# EAGLE board 4draft_onBoard (EAGLE 8.1.0)
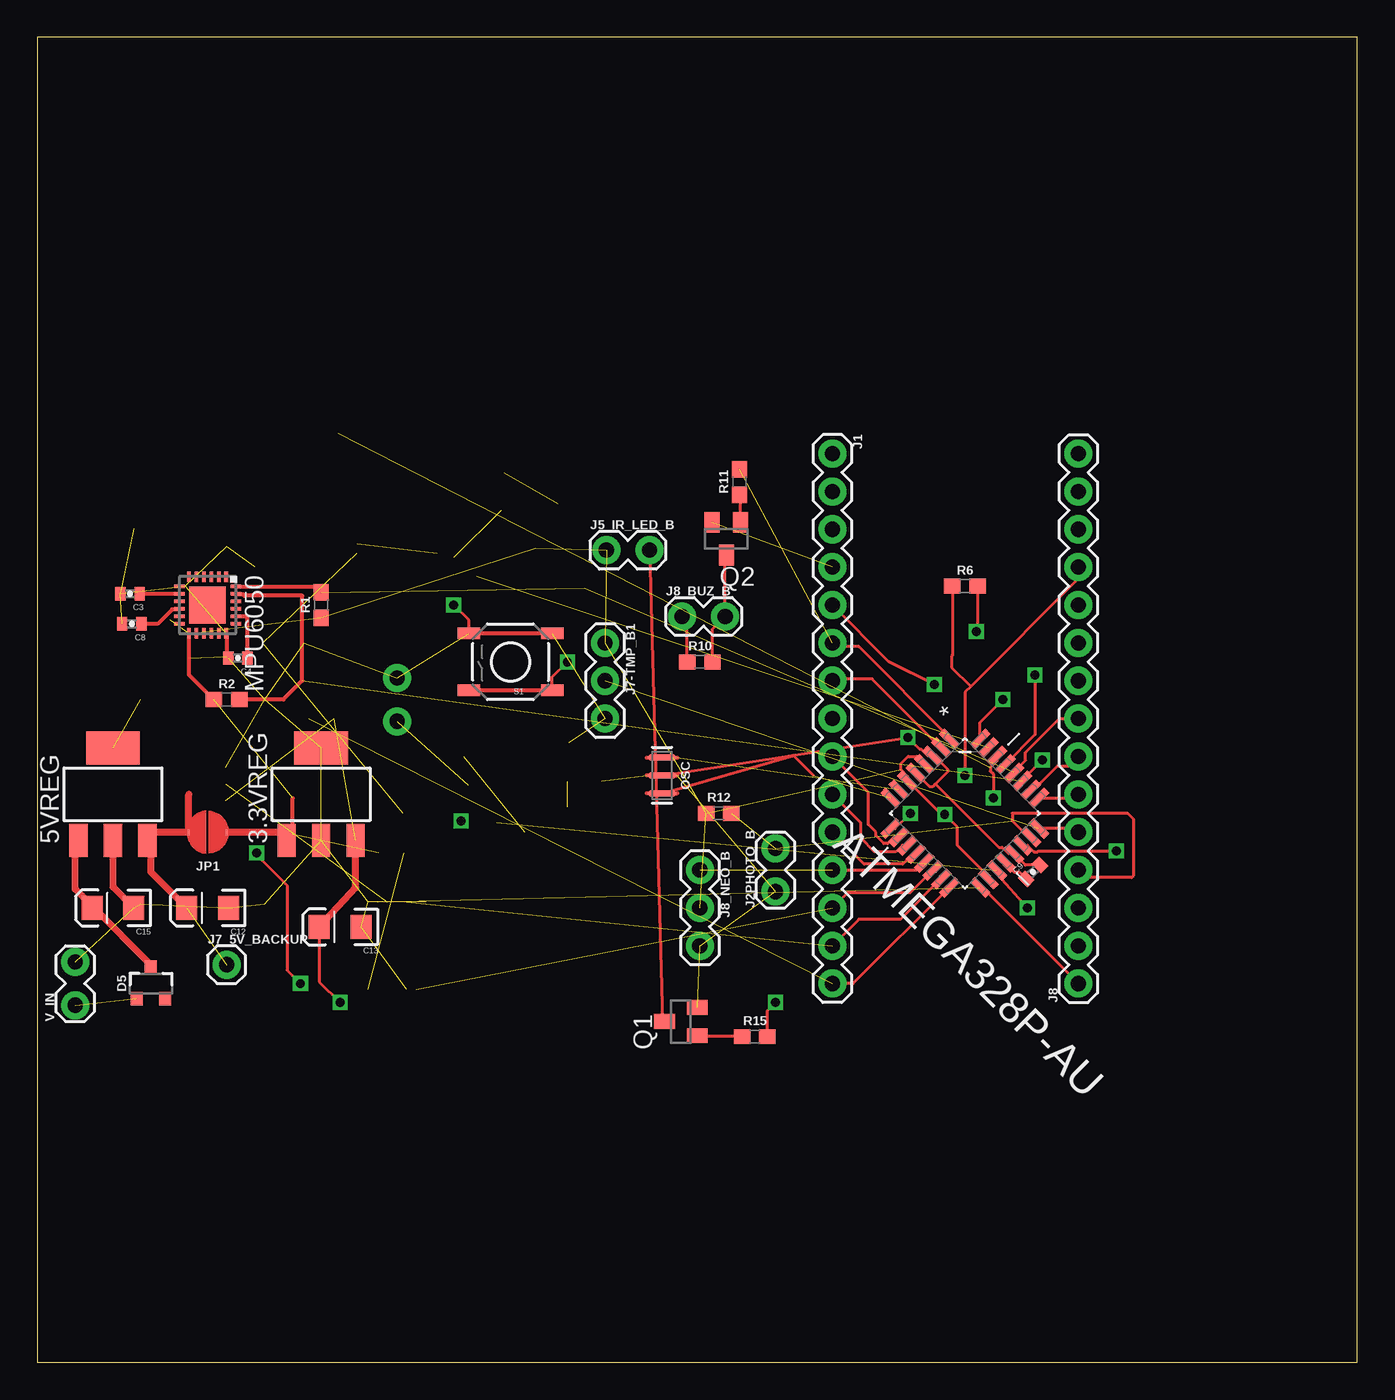
[diagram p0: board, top side]
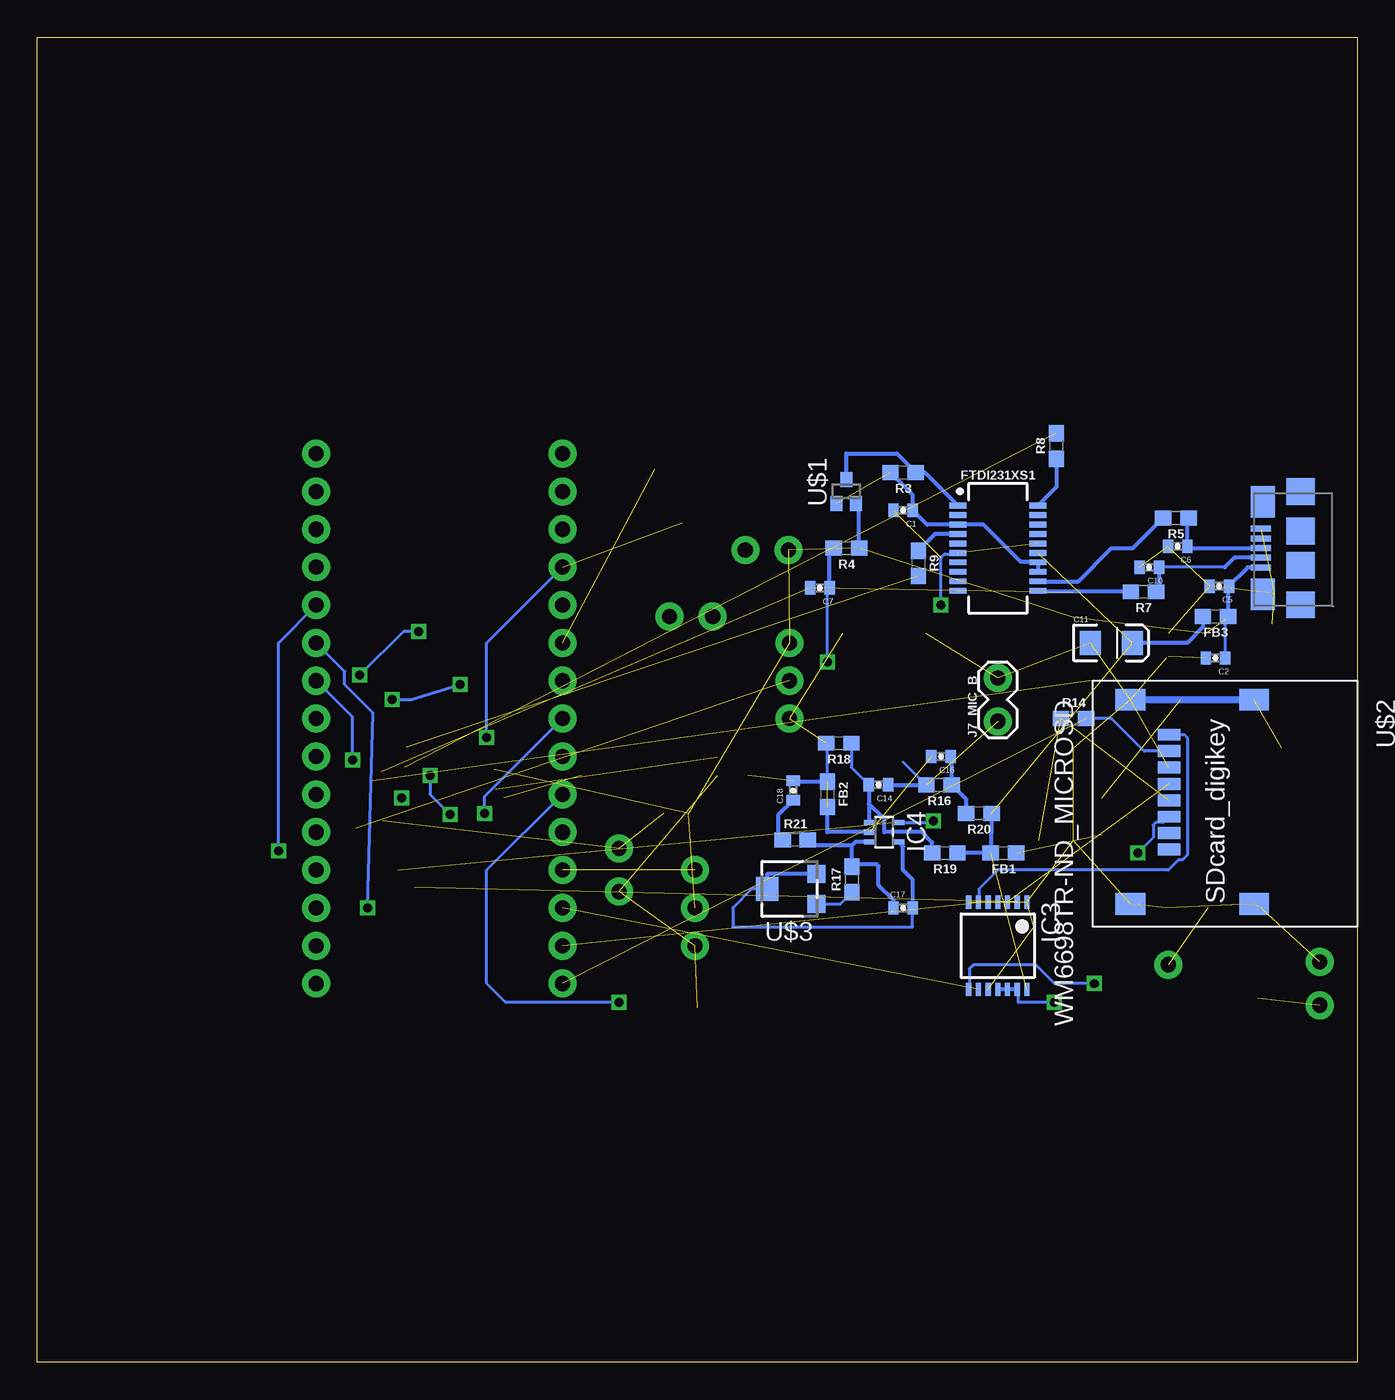
[diagram p1: board, bottom side, seen from below]

Size 88.57 x 88.89 mm. Coordinates in mm from the lower left corner, seen from the top.
Outline: 0,0 88.57,0 88.57,88.89 0,88.89 0,0
Copper layers (1*16): Top 0.035mm / dielectric 1.5mm / Bottom 0.035mm
Design rules "default *": minimum track width 8mil, minimum drill 14mil, track to track 8mil, track to pad 8mil, pad to pad 8mil, via to via 8mil, smd to smd 8mil, copper to edge 40mil, drill to drill 8mil, minimum pad ring 10mil, minimum via ring 8mil, stop-mask expansion 4mil, vias tented up to drill 0mil, thermal gap 10mil

## Footprints (pad centres in the part's own frame; a part is rotated, then mirrored left to right if it is on the bottom)
SOT223 = smd 1.219 x 2.235: 1 -2.311,-3.099; 2 0,-3.099; 3 2.311,-3.099 | smd 3.6 x 2.2: 4 0,3.099
QFP80P900X900X120-32N = smd 1.473 x 0.508: 1 -4.242,2.794; 2 -4.242,2.007; 3 -4.242,1.194; 4 -4.242,0.406; 5 -4.242,-0.406; 6 -4.242,-1.194; 7 -4.242,-2.007; 8 -4.242,-2.794; 17 4.242,-2.794; 18 4.242,-2.007; 19 4.242,-1.194; 20 4.242,-0.406; 21 4.242,0.406; 22 4.242,1.194; 23 4.242,2.007; 24 4.242,2.794 | smd 0.508 x 1.473: 9 -2.794,-4.242; 10 -2.007,-4.242; 11 -1.194,-4.242; 12 -0.406,-4.242; 13 0.406,-4.242; 14 1.194,-4.242; 15 2.007,-4.242; 16 2.794,-4.242; 25 2.794,4.242; 26 2.007,4.242; 27 1.194,4.242; 28 0.406,4.242; 29 -0.406,4.242; 30 -1.194,4.242; 31 -2.007,4.242; 32 -2.794,4.242
0402-CAP = smd 0.7 x 0.9: 1 -0.65,0; 2 0.65,0
EIA3216 = smd 1.4 x 1.6: A 1.4,0; C -1.4,0
SOT23-3 = smd 0.8 x 0.9: 1 -0.95,-1; 2 0.95,-1; 3 0,1.1
0603 = smd 1.1 x 1: 1 -0.85,0; 2 0.85,0
SSOP20_L = smd 0.381 x 1.143: 1 -2.857,-2.68; 2 -2.223,-2.68; 3 -1.587,-2.68; 4 -0.953,-2.68; 5 -0.318,-2.68; 6 0.318,-2.68; 7 0.953,-2.68; 8 1.587,-2.68; 9 2.223,-2.68; 10 2.857,-2.68; 11 2.857,2.68; 12 2.223,2.68; 13 1.587,2.68; 14 0.953,2.68; 15 0.318,2.68; 16 -0.318,2.68; 17 -0.953,2.68; 18 -1.587,2.68; 19 -2.223,2.68; 20 -2.857,2.68
TSSOP14 = smd 0.35 x 0.9: 1 -1.95,-2.925; 2 -1.3,-2.925; 3 -0.65,-2.925; 4 0,-2.925; 5 0.65,-2.925; 6 1.3,-2.925; 7 1.95,-2.925; 8 1.95,2.925; 9 1.3,2.925; 10 0.65,2.925; 11 0,2.925; 12 -0.65,2.925; 13 -1.3,2.925; 14 -1.95,2.925
SC70-5 = smd 0.35 x 0.8: 1 -0.65,-0.95; 2 0,-0.95; 3 0.65,-0.95; 4 0.65,0.95; 5 -0.65,0.95
1X15 = drill 1.016 pad 1.88: 1 0,0; 2 2.54,0; 3 5.08,0; 4 7.62,0; 5 10.16,0; 6 12.7,0; 7 15.24,0; 8 17.78,0; 9 20.32,0; 10 22.86,0; 11 25.4,0; 12 27.94,0; 13 30.48,0; 14 33.02,0; 15 35.56,0
MICRO-USB-DIGIKEY-FCI2 = smd 0.4 x 1.35: D+ 0,2.67; D- -0.65,2.67; GND 1.3,2.67; ID 0.65,2.67; VCC -1.3,2.67 | smd 2.1 x 1.6: SHIELD -3.1,2.55; SHIELD1 3.1,2.55 | smd 1.8 x 1.9: SHIELD2 -3.8,0; SHIELD3 -1.15,0; SHIELD4 1.15,0; SHIELD5 3.8,0
1X02_LOCK = drill 1.016 pad 1.88: 1 -0.178,0; 2 2.718,0
1X03 = drill 1.016 pad 1.88: 1 0,0; 2 2.54,0; 3 5.08,0
1X01 = drill 1.016 pad 1.88: 1 0,0
SMT-JUMPER_2_NO_NO-SILK_ROUND = smd 0.152 x 0.305: 1 -1.27,0; 2 1.27,0
QFN24-4X4 = smd 0.7 x 0.25: 1 -1.9,1.25; 2 -1.9,0.75; 3 -1.9,0.25; 4 -1.9,-0.25; 5 -1.9,-0.75; 6 -1.9,-1.25; 13 1.9,-1.25; 14 1.9,-0.75; 15 1.9,-0.25; 16 1.9,0.25; 17 1.9,0.75; 18 1.9,1.25 | smd 0.25 x 0.7: 7 -1.25,-1.9; 8 -0.75,-1.9; 9 -0.25,-1.9; 10 0.25,-1.9; 11 0.75,-1.9; 12 1.25,-1.9; 19 1.25,1.9; 20 0.75,1.9; 21 0.25,1.9; 22 -0.25,1.9; 23 -0.75,1.9; 24 -1.25,1.9 | smd 2.45 x 2.45: EXP 0,0
RESONATOR-SMD-3.2X1.3 = smd 0.45 x 1.905: 1 -1.2,0; 2 0,0; 3 1.2,0
SOT23 = smd 1 x 1.4: 1 -0.95,-1.1; 2 0.95,-1.1; 3 0,1.1
TACTILE-SWITCH-SMD = smd 1.524 x 0.762: 1 -2.794,1.905; 2 2.794,1.905; 3 -2.794,-1.905; 4 2.794,-1.905
SOT323W_INFINEON = smd 1 x 0.8: 1 -0.8,0.65; 2 0.8,0; 3 -0.8,-0.65
MICROSD2 = smd 0.8 x 1.5: CD/DAT3/SS/CS 8.95,2.6; CLK 5.65,2.6; CMD 7.85,2.6; DAT0 3.45,2.6; DAT1 2.35,2.6; DAT2 10.05,2.6; VDD 6.75,2.6; VSS 4.55,2.6 | smd 1.45 x 2: GND 0,8.3; GND2 13.7,8.3; GND3 13.7,0; GND4 0,0
TC33X-2 = smd 1.2 x 1.2: 1 -1.8,1; 3 -1.8,-1 | smd 1.5 x 1.6: 2 1.5,0

## Placement (x,y rotation side)
3.3VREG  [SOT223]  19.05,38.1 0 top
5VREG  [SOT223]  5.08,38.1 0 top
ATMEGA328P-AU  ATMEGA328P-AU  [QFP80P900X900X120-32N]  62.23,36.83 315 top
C1  .1uF  [0402-CAP]  30.48,57.15 180 bottom
C2  .1uF  [0402-CAP]  9.53,47.24 180 bottom
C3  10nF  [0402-CAP]  6.22,51.56 180 top
C4  2.2nF  [0402-CAP]  13.46,47.24 180 top
C5  .1uF  [0402-CAP]  9.27,52.07 180 bottom
C6  47pF  [0402-CAP]  12.06,54.74 180 bottom
C7  .1uF  [0402-CAP]  36.07,51.94 180 bottom
C8  .1uF  [0402-CAP]  6.35,49.53 180 top
C9  .01 uF  [0402-CAP]  66.8,32.89 45 top
C10  47pF  [0402-CAP]  13.97,53.34 180 bottom
C11  10uF  [EIA3216]  16.51,48.26 0 bottom
C12  10uF  [EIA3216]  11.43,30.48 180 top
C13  10uF  [EIA3216]  20.32,29.21 180 top
C14  .01uF  [0402-CAP]  32.13,38.73 180 bottom
C15  47uF  [EIA3216]  5.08,30.48 180 top
C16  .1uF  [0402-CAP]  27.94,40.64 180 bottom
C17  100pF  [0402-CAP]  30.48,30.48 0 bottom
C18  10uF  [0402-CAP]  37.85,38.35 90 bottom
D5  700mA/40V/533mV  [SOT23-3]  7.62,25.4 0 top
FB1  30Ω/1.8A  [0603]  23.75,34.16 180 bottom
FB2  30Ω/1.8A  [0603]  35.56,38.1 270 bottom
FB3  30Ω/1.8A  [0603]  9.53,50.04 180 bottom
FTDI231XS1  FT231XS  [SSOP20_L]  24.13,54.61 270 bottom
IC3  74ABT125PW  [TSSOP14]  24.13,27.94 180 bottom
IC4  MAX4466KS  [SC70-5]  31.75,35.56 270 bottom
J1  [1X15]  53.34,60.96 270 top
J2  USB_MINI-B_DIGIKEY  [MICRO-USB-DIGIKEY-FCI2]  3.81,54.62 90 bottom
J2PHOTO_B  [1X02_LOCK]  49.53,31.75 90 top
J5_IR_LED_B  [1X02_LOCK]  38.35,54.48 0 top
J7-TMP_B1  [1X03]  38.1,48.26 270 top
J7_5V_BACKUP  [1X01]  12.7,26.67 0 top
J7_MIC_B  [1X02_LOCK]  24.13,43.18 90 bottom
J8  [1X15]  69.85,25.4 90 top
J8_BUZ_B  [1X02_LOCK]  43.43,50.04 0 top
J8_NEO_B  [1X03]  44.45,33.02 270 top
JP1  JUMPER-SMT_2_NO_NO-SILK_ROUND  [SMT-JUMPER_2_NO_NO-SILK_ROUND]  11.43,35.56 180 top
MPU6050  MPU-6050  [QFN24-4X4]  11.43,50.8 270 top
OSC  [RESONATOR-SMD-3.2X1.3]  41.91,39.37 270 top
Q1  NPN 40V 1A SOT-23  [SOT23]  43.18,22.86 90 top
Q2  [SOT23]  46.23,55.24 180 top
R1  10k  [0603]  19.05,50.8 90 top
R2  10k  [0603]  12.7,44.45 0 top
R3  10k  [0603]  30.48,59.69 180 bottom
R4  10k  [0603]  34.29,54.61 180 bottom
R5  27  [0603]  12.19,56.64 180 bottom
R6  10k  [0603]  62.23,52.07 0 top
R7  27  [0603]  14.35,51.69 180 bottom
R8  1k  [0603]  20.19,61.47 90 bottom
R9  1k  [0603]  29.46,53.59 270 bottom
R10  1k  [0603]  44.45,46.99 0 top
R11  1k  [0603]  47.12,59.05 90 top
R12  2.2K  [0603]  45.72,36.83 0 top
R14  10k  [0603]  19.05,43.18 0 bottom
R15  1k  [0603]  48.13,21.84 0 top
R16  1k  [0603]  28.07,38.73 180 bottom
R17  22k  [0603]  33.91,32.38 90 bottom
R18  1M  [0603]  34.8,41.53 180 bottom
R19  1M  [0603]  27.69,34.16 180 bottom
R20  1k  [0603]  25.4,36.83 180 bottom
R21  1k  [0603]  37.72,35.05 0 bottom
S1  TAC_SWITCHSMD  [TACTILE-SWITCH-SMD]  31.75,46.99 180 top
U$1  1N7002PW  [SOT323W_INFINEON]  34.29,58.42 90 bottom
U$2  WM6698TR-ND_MICROSD  [MICROSD2]  15.24,44.45 270 bottom
U$3  TC33X-2POT  [TC33X-2]  38.1,31.75 180 bottom
V_IN  [1X02_LOCK]  2.54,24.13 90 top

## Library data of the parts
3.3VREG 5VREG = linear-technology; MPN: LT1129CST-5#PBF; OC_FARNELL: 1663375; OC_NEWARK: 57M2069
ATMEGA328P-AU = Atmega-328pu; DESCRIPTION: 8-bit Microcontroller with In-System Programmable Flash; MPN: ATMEGA328P-AU; OC_FARNELL: 1715486; OC_NEWARK: 14R4631; PACKAGE: TQFP-32; SUPPLIER: Atmel
C1-C10 C14 C16-C18 = SparkFun-Retired; PROD_ID: CAP-09885
C11-C13 C15 = SparkFun-Retired; PROD_ID: CAP-00811
D5 = SparkFun-DiscreteSemi; PROD_ID: DIO-08411
FB1-FB3 = SparkFun-Coils; PROD_ID: NDUC-07859
FTDI231XS1 = SparkFun-IC-Comms; PROD_ID: IC-11524
IC3 = 74xx-us
IC4 J2 MPU6050 U$1-U$3 = KevinKuwata1
J1 J2PHOTO_B J5_IR_LED_B J7-TMP_B1 J7_5V_BACKUP J7_MIC_B J8 J8_BUZ_B J8_NEO_B V_IN = SparkFun-Connectors
JP1 = SparkFun-Jumpers
OSC = SparkFun-Clocks
Q1 Q2 = semicon-smd-ipc
R1-R12 R14-R21 = SparkFun-Resistors; PROD_ID: RES-12535
S1 = SparkFun-Retired; PROD_ID: SWCH-08247

## Nets
2.2NF: C4.1 MPU6050.20
3.3V: 3.3VREG.3 C13.A IC3.11 IC3.12 IC3.13 R14.1 U$2.VDD
3.3VFTDI: C1.1 FTDI231XS1.3 FTDI231XS1.13 FTDI231XS1.14 R3.2 U$1.1
5REGOUT: 5VREG.3 C12.A J7_5V_BACKUP.1 JP1.2
5V: 3.3VREG.1 ATMEGA328P-AU.4 ATMEGA328P-AU.6 ATMEGA328P-AU.18 C2.1 C5.1 FB1.1 FB3.1 J2.VCC J5_IR_LED_B.1 J7-TMP_B1.1 J8.12 J8_NEO_B.2 JP1.1 MPU6050.13 R1.1 R2.1 R4.1 R6.1 R12.1 U$1.3
10NF: C3.1 MPU6050.8
.UF: C8.1 MPU6050.10
A0: ATMEGA328P-AU.23 J2PHOTO_B.2 J8.4 R12.2
A1: ATMEGA328P-AU.24 J7-TMP_B1.2 J8.5
A2: ATMEGA328P-AU.25 J8.6
A3: ATMEGA328P-AU.26 J8.7
A6: ATMEGA328P-AU.19 IC4.5 J8.10
A7: ATMEGA328P-AU.22 J8.11
ADO: MPU6050.9
BUZ+: J8_BUZ_B.1 R10.1
BUZ-: J8_BUZ_B.2 Q2.3 R10.2
D2: ATMEGA328P-AU.32 J1.5
D3: ATMEGA328P-AU.1 J1.6 R11.2
D4: ATMEGA328P-AU.2 J1.7
D5: ATMEGA328P-AU.9 J1.8
D6: ATMEGA328P-AU.10 J1.9
D7: ATMEGA328P-AU.11 J1.10 R15.2
D8: ATMEGA328P-AU.12 J1.11
D9: ATMEGA328P-AU.13 J1.12 J8_NEO_B.1
D+: C6.1 J2.D+ R5.1
D-: C10.1 J2.D- R7.1
DTR: C7.1 R4.2 S1.1 S1.2
DTR_FTDI: FTDI231XS1.1 R3.1 U$1.2
GND: 3.3VREG.2 3.3VREG.4 5VREG.2 5VREG.4 ATMEGA328P-AU.3 ATMEGA328P-AU.5 ATMEGA328P-AU.21 C1.2 C2.2 C3.2 C4.2 C5.2 C6.2 C8.2 C9.2 C10.2 C11.C C12.C C13.C C15.C C16.2 C18.2 FB2.1 FB2.2 FTDI231XS1.6 FTDI231XS1.16 IC3.1 IC3.4 IC3.7 IC3.10 IC4.2 J1.4 J2.GND J2PHOTO_B.1 J7-TMP_B1.3 J7_MIC_B.2 J8_NEO_B.3 MPU6050.18 OSC.2 Q1.2 Q2.2 R18.2 S1.3 S1.4 U$2.GND U$2.GND2 U$2.GND3 U$2.GND4 U$2.VSS V_IN.2
INT: MPU6050.12
IR_-: J5_IR_LED_B.2 Q1.3
IR_LED: Q1.1 R15.1
MISO: ATMEGA328P-AU.16 J1.15 R14.2 U$2.DAT0
MOSI: ATMEGA328P-AU.15 IC3.5 J1.14
N$1: ATMEGA328P-AU.7 OSC.1
N$2: ATMEGA328P-AU.8 OSC.3
N$6: ATMEGA328P-AU.20 C9.1
N$10: IC3.6 U$2.DAT1
N$12: R17.1 U$3.1
N$14: FTDI231XS1.11 R7.2
N$15: FTDI231XS1.12 R5.2
N$17: C16.1 R16.1 R20.2
N$20: Q2.1 R11.1
N$22: D5.1 V_IN.1
N$24: C14.1 J7_MIC_B.1 R16.2
N$25: C14.2 IC4.1 R18.1 R19.2
N$29: C18.1 R21.1
N$30: C17.1 IC4.3 R17.2 R21.2
N$32: C17.2 IC4.4 U$3.2 U$3.3
RESET: ATMEGA328P-AU.29 R6.2
RX: FTDI231XS1.4 R9.1
RX-I: ATMEGA328P-AU.30 R8.2
RXLED: FTDI231XS1.17
SCK: ATMEGA328P-AU.17 IC3.2 J8.1
SCK_BUFF: IC3.3 U$2.CLK
SCL: ATMEGA328P-AU.27 J8.9 MPU6050.23 R2.2
SDA: ATMEGA328P-AU.28 C7.2 J8.8 MPU6050.24 R1.2
SS: ATMEGA328P-AU.14 IC3.9 J1.13
SS_BUFF: IC3.8 U$2.CMD
TX: FTDI231XS1.20 R8.1
TX-O: ATMEGA328P-AU.31 R9.2
TXLED: FTDI231XS1.10
VCC: C11.A FB1.2 FB3.2 FTDI231XS1.15 IC3.14 R19.1 R20.1
VIN: 5VREG.1 C15.A D5.3

## Tracks (layer width: path | path; a pad name or v marks a point on that pad's centre or on a via)
2.2NF
  Top 0.254: MPU6050.20 13.34,50.04 13.97,50.04 14.11,49.9 C4.1
3.3V  (via drill 0.6)  (2 unrouted)
  Top 0.203: C13.A 18.92,25.53 v20.32,24.13
  Top 0.457: C13.A 21.36,31.85 3.3VREG.3
  Bottom 0.203: v20.32,24.13 22.73,24.13 22.73,24.92 IC3.13
  Bottom 0.254: IC3.11 IC3.12 IC3.13
3.3VFTDI  (1 unrouted)
  Bottom 0.254: FTDI231XS1.13 FTDI231XS1.14 21.51,53.72 22.61,53.72 25.08,56.2 FTDI231XS1.3 28.88,56.2 C1.1 29.83,58.19 R3.2
5REGOUT  (1 unrouted)
  Top 0.457: 10.16,38.1 JP1.2 7.95,35.56 5VREG.3 7.62,34.77 7.62,32.89 C12.A
5V  (via drill 0.6)  (10 unrouted)
  Top 0.203: ATMEGA328P-AU.4 58.99,40.64 58.42,40.64 57.94,40.16 57.94,39.76 58.39,39.31 ATMEGA328P-AU.6 58.76,38.61 58.8,38.61 60.66,36.75 v60.88,36.75 61.72,35.9 61.72,34.67 63.81,32.58 ATMEGA328P-AU.18 | J8.12 69.85,52.56 62.62,45.33 | v62.23,39.37 62.25,39.39 62.25,44.96 62.62,45.33 | R6.1 61.38,47.41 61.34,47.37 61.34,46.61 62.62,45.33
  Top 0.254: MPU6050.13 10.18,46.12 R2.1 | 3.3VREG.1 17.14,35.41 17.14,37.85
  Top 0.457: JP1.1 16.18,35.56 3.3VREG.1
  Bottom 0.203: v62.23,39.37 62.23,38.1 v60.88,36.75 | C2.1 8.88,49.84 FB3.1
  Bottom 0.254: J2.VCC 7.37,53.32 C5.1 8.68,52.02 FB3.1 | R4.1 33.44,57.42 U$1.3
10NF
  Top 0.254: MPU6050.8 6.88,51.55 C3.1
.UF
  Top 0.254: MPU6050.10 9.48,50.51 9.04,50.51 8.07,49.53 C8.1
A0  (2 unrouted)
  Top 0.203: 66.61,35.25 ATMEGA328P-AU.23 66.34,35.56 66.17,35.56 65.41,36.32 65.41,36.83 66.04,36.83 66.06,36.85 73.13,36.85 73.53,36.45 73.53,32.64 73.41,32.51 70.36,32.51 J8.4
A1  (1 unrouted)
  Top 0.203: ATMEGA328P-AU.24 69.6,35.81 J8.5
A2
  Top 0.203: ATMEGA328P-AU.25 69.6,37.85 J8.6
A3
  Top 0.203: ATMEGA328P-AU.26 66.86,38.41 68.45,40.01 69.22,40.01 J8.7
A6  (via drill 0.6)  (1 unrouted)
  Top 0.203: ATMEGA328P-AU.19 64.39,32.77 v66.42,30.48
  Bottom 0.203: v66.42,30.48 66.04,43.56 67.94,45.47 67.94,46.35 J8.10 | IC4.5 28.56,36.21 v28.45,36.32
A7  (via drill 0.6)
  Top 0.203: ATMEGA328P-AU.22 66.43,34.67 66.86,34.24 67.12,34.24 67.16,34.29 v72.39,34.29
  Bottom 0.203: v72.39,34.29 72.39,48.26 J8.11
BUZ+
  Top 0.203: R10.1 43.6,49.69 J8_BUZ_B.1
BUZ-
  Top 0.203: Q2.3 46.15,54.07 J8_BUZ_B.2 45.3,49.19 R10.2
D2  (via drill 0.6)
  Top 0.203: ATMEGA328P-AU.32 63.25,42.93 v64.77,44.45 | v60.2,45.47 57.15,46.99 J1.5
  Bottom 0.203: v64.77,44.45 63.5,44.45 v60.2,45.47
D3  (1 unrouted)
  Top 0.203: ATMEGA328P-AU.1 61.21,41.92 55.12,48.01 53.59,48.01 J1.6 53.21,48.13
D4
  Top 0.203: ATMEGA328P-AU.2 60.61,41.25 56.01,45.85 53.47,45.85 J1.7
D5  (via drill 0.6)
  Top 0.203: ATMEGA328P-AU.9 57.54,35.81 v58.57,36.83
  Bottom 0.203: v58.57,36.83 58.57,37.95 J1.8
D6
  Top 0.203: ATMEGA328P-AU.10 57.49,35.25 57.04,34.8 56.79,34.8 56.25,35.34 56.25,35.57 55.75,36.07 55.75,38.23 J1.9
D7  (via drill 0.6)
  Top 0.203: ATMEGA328P-AU.11 58.03,34.67 57.6,34.24 56.18,34.24 55.24,35.18 55.24,36.2 J1.10 | R15.2 48.98,23.58 v49.53,24.13
  Bottom 0.203: v49.53,24.13 57.15,24.13 58.42,25.4 58.42,33.02 J1.10
D8
  Top 0.203: ATMEGA328P-AU.12 58.76,34.12 58.06,33.43 55.47,33.43 J1.11
D9  (1 unrouted)
  Top 0.203: J1.12 58.99,33.02 ATMEGA328P-AU.13
D+
  Bottom 0.254: J2.D+ 11.3,54.62 C6.1 11.41,56.57 R5.1
D-
  Bottom 0.203: 8.89,53.34 C10.1
  Bottom 0.254: J2.D- 8.26,53.97 8.89,53.34 | R7.1 13.32,51.69 C10.1
DTR  (via drill 0.6)
  Top 0.203: S1.1 34.54,45.97 v35.56,46.99
  Top 0.254: S1.2 S1.1
  Bottom 0.203: v35.56,46.99 35.56,51.8 C7.1
  Bottom 0.254: C7.1 35.42,54.33 R4.2
DTR_FTDI
  Bottom 0.254: FTDI231XS1.1 29.03,59.69 R3.1 30.9,60.96 34.29,60.96 U$1.2
GND  (via drill 0.6)  (36 unrouted)
  Top 0.203: 60.26,38.8 61.09,39.62 61.09,39.75 60.16,40.67 ATMEGA328P-AU.3 59.75,40.67 59.3,41.12 59.21,41.12 v58.42,41.91 OSC.2 | 60.26,38.8 60.07,38.61 59.88,38.61 ATMEGA328P-AU.5 | 60.26,38.8 64.51,34.55 64.73,34.55 65.16,34.12 ATMEGA328P-AU.21 66.28,33.35 C9.2 | S1.4 28.96,49.78 v27.94,50.8
  Top 0.254: S1.3 S1.4 | MPU6050.18 12.7,48.88 12.7,47.36 C4.2
  Top 0.457: C15.C 5.08,31.88 5VREG.2
  Bottom 0.203: v58.42,41.91 58.42,48.26 J1.4 | FB2.1 35.56,41.44 R18.2 | 28.57,40.66 C16.2 | v27.94,50.8 27.94,53.98 27.69,54.23 26.87,54.23 FTDI231XS1.6
  Bottom 0.254: 12.7,54.75 C6.2 12.7,54.72 | IC4.2 35.56,35.56 FB2.2 | FB2.1 37.79,38.95 C18.2
  Bottom 0.457: U$2.GND4 U$2.GND
IR_-
  Top 0.203: J5_IR_LED_B.2 41.95,22.73 Q1.3
IR_LED
  Top 0.203: Q1.1 47.22,21.91 R15.1
MISO  (1 unrouted)
  Top 0.203: ATMEGA328P-AU.16 61.19,31.86 54.74,25.4 J1.15
  Bottom 0.203: U$2.DAT0 14.33,41 16.51,43.18 R14.2
MOSI  (1 unrouted)
  Top 0.203: ATMEGA328P-AU.15 60.61,32.41 57.91,29.72 55.12,29.72 J1.14
N$1  (1 unrouted)
N$2  (1 unrouted)
  Top 0.203: OSC.3 50.73,40.71 52.07,39.37
N$6
  Top 0.203: ATMEGA328P-AU.20 64.94,33.48 65.53,32.89 65.88,32.89 C9.1
N$10
  Bottom 0.203: U$2.DAT1 11.62,42.1 11.43,41.91 11.43,34.03 11.76,33.7 12.03,33.7 12.7,33.02 24.13,33.02 25.4,31.75 25.4,30.89 IC3.6
N$12
  Bottom 0.203: U$3.1 34.69,30.75 R17.1
N$14
  Bottom 0.254: R7.2 21.39,51.69 FTDI231XS1.11
N$15
  Bottom 0.254: FTDI231XS1.12 18.73,52.39 16.51,54.61 15.07,54.61 R5.2
N$17
  Bottom 0.254: C16.1 27.22,40.57 R16.1 26.25,37.77 R20.2
N$20
  Top 0.203: Q2.1 47.18,58.14 R11.1
N$22  (1 unrouted)
N$24  (1 unrouted)
  Bottom 0.203: R16.2 28.96,38.73 30.48,40.26
  Bottom 0.254: C14.1 R16.2
N$25
  Bottom 0.203: R18.1 33.95,39.9 C14.2
  Bottom 0.254: 32.78,37.47 C14.2 32.6,38.92 | 32.78,37.47 32.78,36.29 IC4.1 | R19.2 28.54,34.89 29.21,35.56 31.75,35.56 31.75,36.43 32.78,37.47
N$29
  Bottom 0.254: C18.1 38.86,36.7 38.86,35.34 R21.1
N$30
  Bottom 0.254: IC4.3 33.67,34.91 33.91,34.67 | 33.91,34.67 R17.2 33.74,33.4 32.26,33.4 32.13,33.27 32.13,32 31.13,31 C17.1 | 33.91,34.67 36.49,34.67 R21.2
N$32
  Bottom 0.203: U$3.2 40.64,31.75 41.91,30.48 41.91,29.21 29.84,29.21 29.84,30.46 C17.2
  Bottom 0.254: U$3.3 39.6,32.75 U$3.2 | IC4.4 30.48,34.59 30.48,33.02 29.83,32.37 C17.2
RESET  (via drill 0.6)
  Top 0.203: R6.2 63.08,49.11 v62.99,49.02 | v66.93,46.1 66.93,42.1 ATMEGA328P-AU.29
  Bottom 0.203: v62.99,49.02 64.01,49.02 v66.93,46.1
RX
  Bottom 0.254: FTDI231XS1.4 28.35,55.56 R9.1
RX-I  (via drill 0.6)  (1 unrouted)
  Top 0.203: ATMEGA328P-AU.30 64.39,40.35 63.94,39.9 63.94,39.65 64.14,39.45 v64.14,37.85
SCK  (1 unrouted)
  Top 0.203: ATMEGA328P-AU.17 63.4,31.86 J8.1
SCK_BUFF  (1 unrouted)
SCL  (via drill 0.6)  (1 unrouted)
  Top 0.203: ATMEGA328P-AU.27 66.07,39.06 v67.42,40.41
  Top 0.254: R2.2 16.51,44.45 17.78,45.72 17.78,51.44 13.89,51.44 13.82,51.51 13.38,51.51 MPU6050.23
  Bottom 0.203: v67.42,40.41 67.42,43.29 J8.9
SDA  (2 unrouted)
  Top 0.203: ATMEGA328P-AU.28 65.52,39.61 66.29,40.39 66.29,40.89 68.58,43.18 J8.8
  Top 0.254: MPU6050.24 18.65,52.05 R1.2
SS  (1 unrouted)
  Top 0.203: ATMEGA328P-AU.14 60.04,32.99 58.55,31.5 54.36,31.5 J1.13
SS_BUFF  (via drill 0.6)
  Top 0.203: v14.73,34.16 14.73,34.04 16.76,32 16.76,26.29 v17.65,25.4
  Bottom 0.203: v14.73,34.16 13.7,35.2 13.7,36.03 13.52,36.2 13.04,36.2 U$2.CMD | v17.65,25.4 20.32,25.4 21.59,26.67 25.78,26.67 26.04,26.42 26.04,25.06 IC3.8
TX
  Bottom 0.254: R8.1 20.19,58.73 FTDI231XS1.20
TX-O  (1 unrouted)
VCC  (3 unrouted)
  Bottom 0.254: FB3.2 10.38,49.31 11.43,48.26 C11.A | R20.1 FB1.2 R19.1
VIN
  Top 0.457: D5.3 7.62,26.67 3.68,30.61 | 5VREG.1 2.54,34.77 2.54,31.75 3.68,30.61 | C15.A 3.68,30.61